# Altium PCB ETS_v8-nordic-split_1-sided.PcbDoc
Units mil, origin at the board's own origin, x right, y up, seen from the top; angles counter-clockwise.
Board outline 1165.35 x 326.77 mil, 2 copper layers (Top Layer, Bottom Layer), stack 62.8 mil thick; 35 components, 30 nets, 135 pads, 36 vias.
Unrouted connection lines stored in the file: 6.
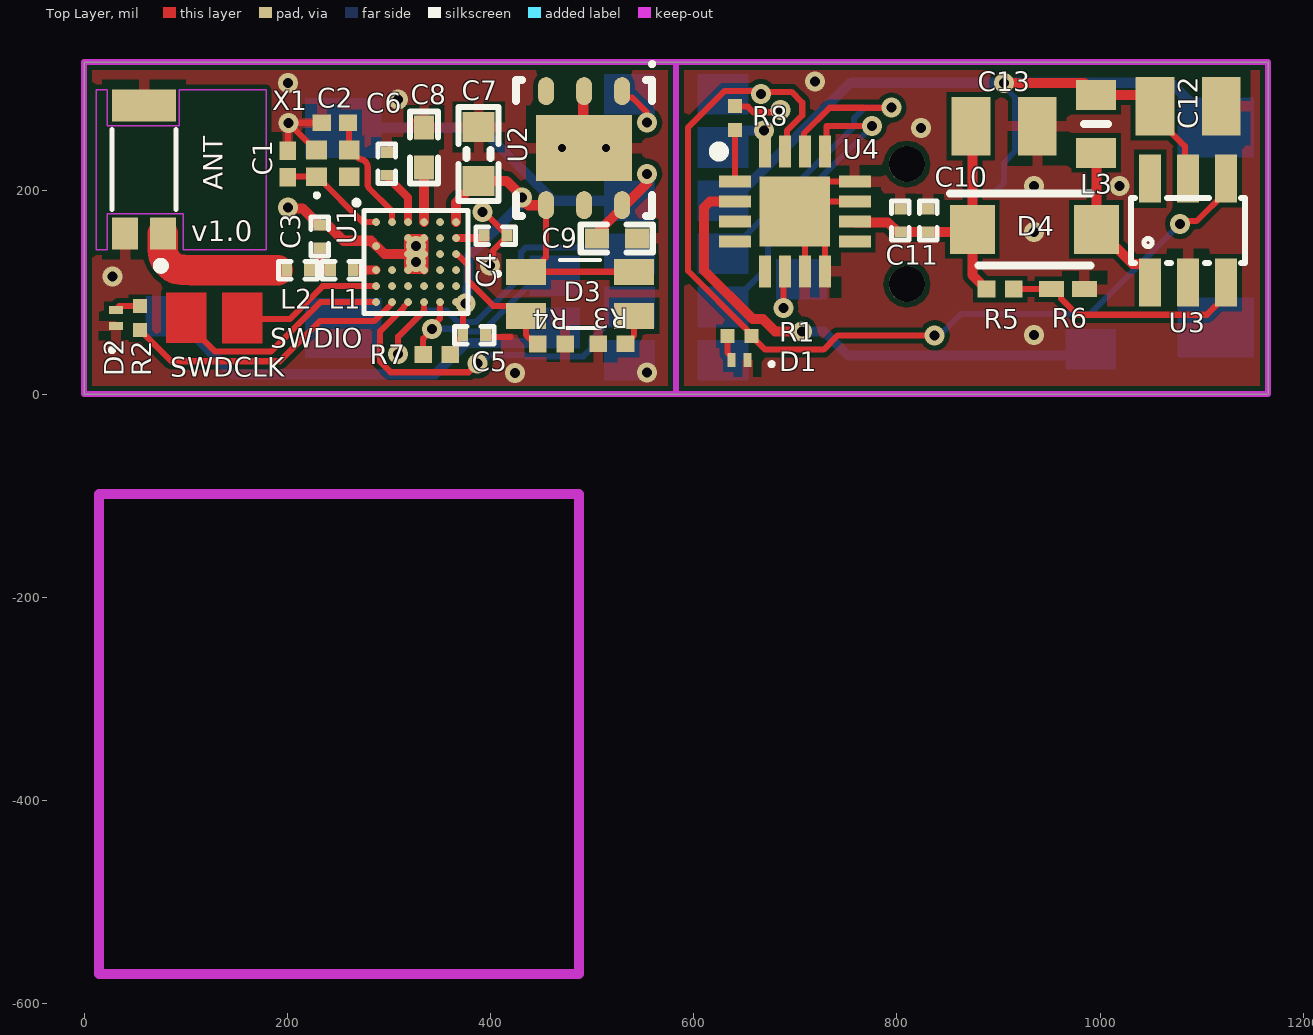
[diagram p0: Top Layer view]
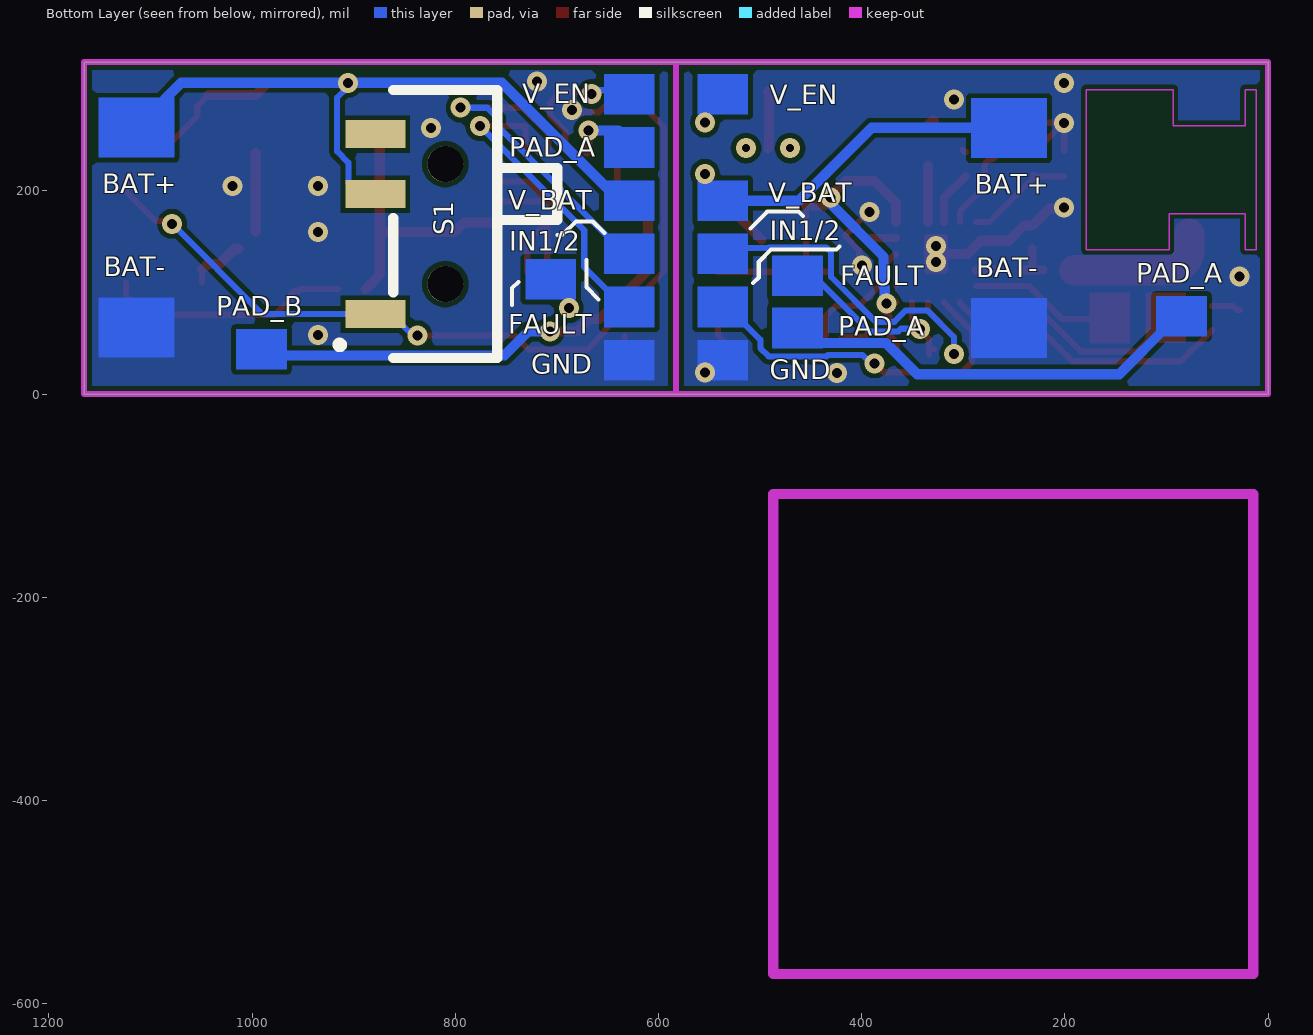
[diagram p1: Bottom Layer view, seen from below]
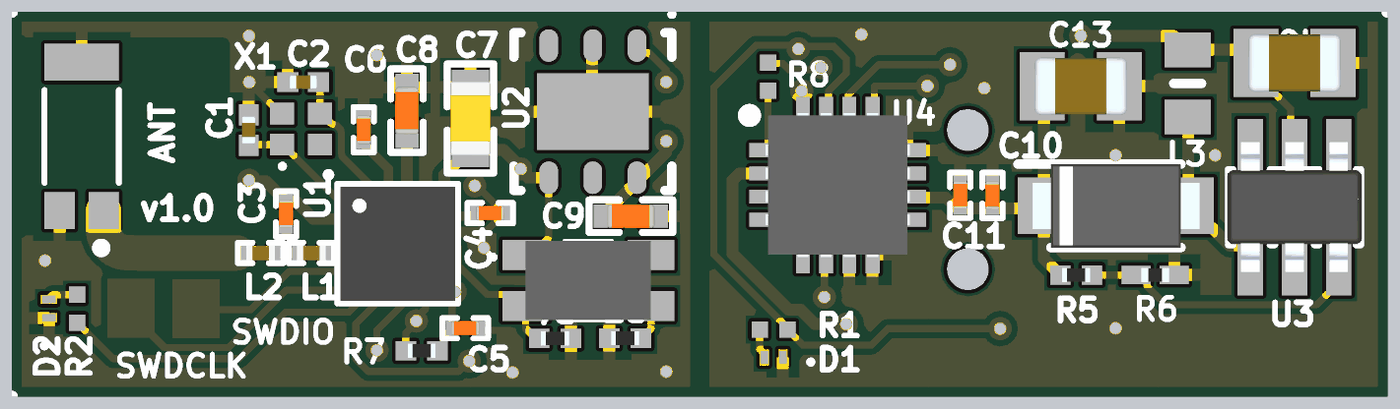
[diagram p2: 3D render of the assembled board from above, using the file's embedded part models]

## Layer stack, top to bottom
Top Solder: solder mask 0.4, Solder Resist, Dk 3.5
Top Layer: signal copper 1.4
Dielectric1: core 60, FR-4, Dk 4.8
Bottom Layer: signal copper 1.4
Bottom Solder: solder mask 0.4, Solder Resist, Dk 3.5

## Board outline
0,0 1165.35,0 1165.35,326.77 0,326.77

## Design rules (kind name [scope] priority, off if disabled: settings)
Clearance Polygon_ANT [(InNamedPolygon('Top_Layer-GND')) or (InNamedPolygon('Bottom_Layer-GND')) vs InNet('RF')] p1: gap=5 ignorepadtopadclearanceinfootprint=FALSE except(0: Arc-Hole Track-Hole SMDPad-Hole THPad-Hole Via-Hole Fill-Hole Poly-Hole Region-Hole Text-Hole)
Clearance Polygon [(InNamedPolygon('Top_Layer-GND')) or (InNamedPolygon('Bottom_Layer-GND')) or (InNamedPolygon('Mid_Layer_1-GND')) or (InNamedPolygon('Mid_Layer_2-GND'))] p2: gap=8 ignorepadtopadclearanceinfootprint=FALSE except(0: Arc-Hole Track-Hole SMDPad-Hole THPad-Hole Via-Hole Fill-Hole Poly-Hole Region-Hole Text-Hole)
Clearance [All] p3: gap=5 ignorepadtopadclearanceinfootprint=FALSE except(3.5: Arc-Arc Arc-Track Track-Track)
ComponentClearance [All] p1 off: gap=10 collisioncheckmode=3 verticalgap=10 showdistances=FALSE
FabricationTestPointUsage TestPointUsage [All] p1: valid=0 allowmultiple=FALSE
FabricationTestpoint Testpoint [All] p1: side=3 testpointundercomponent=TRUE minsize=40 maxsize=100 preferedsize=60 minholesize=0 maxholesize=40 preferedholesize=32 testpointgrid=1 allowsidetop=TRUE allowsidebottom=TRUE usegrid=TRUE gridtolerance=0.01
Height [All] p1 off: minheight=0 maxheight=1000 prefheight=500
HoleSize [All] p1: absolutevalues=TRUE maxlimit=248.03 minlimit=7.87 maxpercent=80.000 minpercent=20.000
HoleToHoleClearance [All] p1 off: gap=3 allowstackedmicrovias=FALSE
MinimumAnnularRing [All] p1 off: minimumring=3
PolygonConnect PolygonConnect_1 [isVia and innet(gnd)] p1: connectstyle=Direct reliefconductorwidth=10 reliefentries=4 polygonreliefangle="90 Angle" airgapwidth=10
PolygonConnect [All] p2: connectstyle=Relief reliefconductorwidth=10 reliefentries=4 polygonreliefangle="90 Angle" airgapwidth=10
RoomDefinition ETS_v8-nordic-split [InComponentClass('ETS_v8-nordic-split')] p1: confinementstyle=ConfineIn formatcopy=TRUE lockcomponents=FALSE outline -86.61,-122.05 1255.91,-122.05 1255.91,386.77 -86.61,386.77
RoutingVias [All] p1: holewidth=16 width=32 viastyle="Through Hole" minholewidth=3.94 minwidth=9.84 maxholewidth=28 maxwidth=50
SilkToSolderMaskClearance SilkscreenOverComponentPads [IsPad] p1: minsilkscreentomaskgap=10 clearancetoexposedcopper=TRUE
SolderMaskExpansion [All] p1: expansion=3 istentingtop=FALSE
Width [All] p1: maxlimit=100 minlimit=5 preferedwidth=6 minimp=50.000000 maximp=50.000000 favimp=50.000000
23 further rules are at their usual default settings.

## Components (designator, comment, footprint, x,y, rotation, side; value= is the part's Value field where it differs from the comment)
ANT "W3008" *ANTENNA_W3008W3008(Primary) 59.06,220.98 r270 top
C1 "16pF" CAPC0603X33N 200.49,226.38 r270 top
C2 "16pF" CAPC0603X33N 246.75,267.1 r0 top
C3 "1.2pF" CAPC0603X03L_C 232.15,155.04 r270 top
C4 "100nF" CAPC0603X03L_C 405.16,155.84 r0 top
C5 "100nF" CAPC0603X03L_C 383.98,58.08 r0 top
C6 "100pF" CAPC0603X03L_C 297.96,226.69 r270 top
C7 "4.7µF" CAPC1608X06L 388.37,236.22 r90 top
C8 "1.0µF" CAPC1005X04L 334.65,242.87 r270 top
C9 "1.0µF" CAPC1005X04L 524.31,153.29 r180 top
C10 "100nF" CAPC0603X03L_C 830.71,170.86 r90 top
C11 "100nF" CAPC0603X03L_C 803.36,170.96 r270 top
C12 "22uF" CAPC2012X145N 1086.61,283.35 r0 top
C13 "22uF" CAPC2012X145N 905.51,263.62 r0 top
D1 "APG0603VGC-TT-5MAV" LED_APG0603SEC-E-TT 645.24,33.35 r180 top
D2 "APG0603SURC-TT" LED_APG0603SEC-E-TT 31.33,74.77 r90 top
D3 "GP2S60A" GP2S60B 488.19,98.73 r0 top
D4 "SS34FA" SODFL3618X143N 935.32,162.06 r0 top
L1 "2.2nH" INDC0603X03L_C 253.65,122.05 r180 top
L2 "3.3nH" INDC0603X03L_C 210.65,122.04 r180 top
L3 "LQM18PH4R7MFRL" LQW18CA32NJ00D 996.06,265.98 r270 top
R1 "60R 1% 0201(0603)" RESC0201(0603)_L 645.24,56.97 r180 top value="1.00 Ohm"
R2 "137R 1% 0201(0603)" RESC0201(0603)_L 55.12,74.8 r90 top value="1.00 Ohm"
R3 "210R 1% 0201(0603)" RESC0603X26N 519.46,49.58 r0 top
R4 "324R 1% 0201(0603)" RESC0603X26N 460.06,49.42 r180 top
R5 "10kR" RESC0603X26N 901.57,103.31 r180 top
R6 "4.7kR" RESC0603X28N 968.5,103.31 r180 top
R7 "1kR" RESC0603X26N 347.12,38.96 r0 top
R8 "120mR 1% 0201(0603)" RESC0201(0603)_L 640.56,271.65 r90 top value="1.00 Ohm"
S1 "SSSS810701" SSSS810701 878.75,196.83 r90 bottom
U1 "nRF52811-CAAA" BGA33C40P6X6_247X246X50 326.77,129.92 r0 top
U2 "LD39050PU33R" DFN6D_L 492.13,242.03 r270 top
U3 "" *SOT23-6 1086.61,160.92 r0 top
U4 "DRV8847RTER" QFN50P300X300X80-17N-D 699.62,179.71 r0 top
X1 "ECS-320-10-48-CKY-TR" ECS240848CKYTR 244.78,227.15 r0 top

## Footprints (in the part's own frame and the unit in brackets; to place one, negate y for a bottom-side part, rotate by r counter-clockwise, add the part's x,y. Pads: shape width x height; smd on the part's side, far side on the other; paste and mask are expansions set on the pad)
*ANTENNA_W3008W3008(Primary) [mm]
  rect 0.8x0.65 smd: FEED(1.6,0.475) G1(1.6,-0.475)
  rect 0.8x1.6 smd: G2(-1.6,0)
  Keep-Out Layer region: -2,-1.2 -2,-0.925 -1.1,-0.925 -1.1,0.875 -2,0.875 -2,3.05 2,3.05 2,0.975 1.1,0.975 1.1,-0.925 2,-0.925 2,-1.2
  Keep-Out Layer region: -2,-1.2 2,-1.2 2,-0.925 1.1,-0.925 1.1,0.975 2,0.975 2,3.05 -2,3.05 -2,0.875 -1.1,0.875 -1.1,-0.925 -2,-0.925
  Keep-Out Layer region: -2,-1.2 -2,-0.925 -1.1,-0.925 -1.1,0.875 -2,0.875 -2,3.05 2,3.05 2,0.975 1.1,0.975 1.1,-0.925 2,-0.925 2,-1.2
  Keep-Out Layer region: -2,-1.2 2,-1.2 2,-0.925 1.1,-0.925 1.1,0.975 2,0.975 2,3.05 -2,3.05 -2,0.875 -1.1,0.875 -1.1,-0.925 -2,-0.925
  Keep-Out Layer region: -2,-1.2 -2,-0.925 -1.1,-0.925 -1.1,0.875 -2,0.875 -2,3.05 2,3.05 2,0.975 1.1,0.975 1.1,-0.925 2,-0.925 2,-1.2
  Keep-Out Layer region: -2,-1.2 2,-1.2 2,-0.925 1.1,-0.925 1.1,0.975 2,0.975 2,3.05 -2,3.05 -2,0.875 -1.1,0.875 -1.1,-0.925 -2,-0.925
  silkscreen extent -1,-0.8 2.5,0.8
*SOT23-6 [mm]
  rect 0.55x1.2 smd: 1(-0.95,-1.3) 2(0,-1.3) 3(0.95,-1.3) 4(0.95,1.3) 5(0,1.3) 6(-0.95,1.3)
  silkscreen extent -1.42,-0.81 1.42,0.81, body extent -1.45,-1.4 1.45,1.4, height 1.45
BGA33C40P6X6_247X246X50 [mm] "BGA, 33-Leads, Body 2.47x2.46mmx0.50mm, Pitch 0.40mm"
  round 0.194 smd mask+0.05: A1(-1,1) A2(-0.6,1) A3(-0.2,1) A4(0.2,1) A5(0.6,1) A6(1,1) B3(-0.2,0.6) B4(0.2,0.6) B5(0.6,0.6) B6(1,0.6) C1(-1,0.4) D3(-0.2,0.2) D4(0.2,0.2) D5(0.6,0.2) D6(1,0.2) E1(-1,-0.2) E2(-0.6,-0.2) E3(-0.2,-0.2) E4(0.2,-0.2) E5(0.6,-0.2) E6(1,-0.2) F1(-1,-0.6) F2(-0.6,-0.6) F3(-0.2,-0.6) F4(0.2,-0.6) F5(0.6,-0.6) F6(1,-0.6) G1(-1,-1) G2(-0.6,-1) G3(-0.2,-1) G4(0.2,-1) G5(0.6,-1) G6(1,-1)
  silkscreen extent -1.55,-1.29 1.3,1.55, body extent -1.23,-1.23 1.23,1.23, height 0.5
CAPC0603X03L_C [mm] "Chip Capacitor, 2-Leads, Body 0.6x0.3mm, IPC High Density"
  rect 0.27x0.3 smd: 1(-0.285,0) 2(0.285,0)
  silkscreen extent -0.49,-0.22 0.49,0.22, body extent -0.3,-0.15 0.31,0.15, height 0.3
CAPC0603X33N [mm]
  rect 0.46x0.42 smd: 1(-0.33,0) 2(0.33,0)
  body extent -0.3,-0.15 0.3,0.15, height 0.33
CAPC1005X04L [mm] "Chip Capacitor, 2-Leads, Body 1.0x0.5mm, IPC High Density"
  rect 0.6x0.5 smd: 1(-0.5,0) 2(0.5,0)
  silkscreen extent -0.9,-0.35 0.9,0.35, body extent -0.51,-0.25 0.51,0.25, height 0.5
CAPC1608X06L [mm] "Chip Capacitor, 2-Leads, Body 1.6x0.8mm, IPC High Density"
  rect 0.75x0.8 smd: 1(-0.675,0) 2(0.675,0)
  silkscreen extent -1.17,-0.5 1.17,0.5, body extent -0.8,-0.43 0.8,0.43, height 0.8
CAPC2012X145N [mm]
  rect 0.97x1.47 smd: 1(-0.83,0) 2(0.83,0)
  body extent -1,-0.63 1,0.63, height 1.45
DFN6D_L [mm] "SON, 6-Leads, Body 3x3mm, Pitch 0.95mm, Thermal Pad 2.4x1.65mm, IPC High Density"
  oval 0.7x0.4 smd: 1(-1.425,0.95) 2(-1.425,0) 3(-1.425,-0.95) 4(1.425,-0.95) 5(1.425,0) 6(1.425,0.95)
  rect 1.65x2.4 smd: 7(0,0)
  silkscreen extent -2.15,-1.7 1.7,1.75, body extent -1.55,-1.55 1.55,1.55, height 0.95
ECS240848CKYTR [mm]
  rect 0.52x0.47 smd: 1(-0.41,-0.335) 2(0.41,-0.335) 3(0.41,0.335) 4(-0.41,0.335)
  silkscreen extent -0.45,-0.85 -0.35,-0.75
GP2S60B [mm]
  rect 1x0.65 smd: 1(-1.35,0.55) 2(-1.35,-0.55) 3(1.35,-0.55) 4(1.35,0.55)
  silkscreen extent -2.1,-0.85 0.5,0.85, body extent -1.35,-0.85 1.35,0.85, height 1.35
INDC0603X03L_C [mm] "Chip Inductor, 2-Leads, Body 0.6x0.3mm, IPC High Density"
  rect 0.27x0.3 smd: 1(-0.285,0) 2(0.285,0)
  silkscreen extent -0.49,-0.22 0.49,0.22, body extent -0.31,-0.16 0.31,0.16, height 0.26
LED_APG0603SEC-E-TT [mm]
  rect 0.2x0.35 smd paste-1: A(0.2,0) C(-0.2,0)
  silkscreen extent -0.85,0.05 -0.75,0.15
LQW18CA32NJ00D [mm]
  rect 0.75x1 smd: 1(-0.725,0) 2(0.725,0)
  silkscreen extent 0,-0.3 0,0.3
QFN50P300X300X80-17N-D [mm]
  rect 0.8x0.3 smd: 1(-1.5,0.75) 2(-1.5,0.25) 3(-1.5,-0.25) 4(-1.5,-0.75) 9(1.5,-0.75) 10(1.5,-0.25) 11(1.5,0.25) 12(1.5,0.75)
  rect 0.3x0.8 smd: 5(-0.75,-1.5) 6(-0.25,-1.5) 7(0.25,-1.5) 8(0.75,-1.5) 13(0.75,1.5) 14(0.25,1.5) 15(-0.25,1.5) 16(-0.75,1.5)
  rect 1.76x1.76 smd: 17(0,0)
  silkscreen extent -2.02,1.38 -1.77,1.62, body extent -1.55,-1.55 1.55,1.55, height 0.8
RESC0201(0603)_L [mm] "Chip Resistor, Body 0.6x0.3mm, IPC High Density"
  rect 0.35x0.35 smd: 1(-0.3,0) 2(0.3,0)
  body extent -0.31,-0.16 0.31,0.16, height 0.3
RESC0603X26N [mm]
  rect 0.44x0.42 smd: 1(-0.34,0) 2(0.34,0)
  body extent -0.3,-0.15 0.3,0.15, height 0.26
RESC0603X28N [mm]
  rect 0.625x0.4 smd: 1(-0.412,0) 2(0.412,0)
  body extent -0.3,-0.15 0.3,0.15, height 0.28
SODFL3618X143N [mm]
  rect 1.12x1.22 smd: 1(-1.55,0) 2(1.55,0)
  silkscreen extent -2.11,-0.9 1.4,0.9, body extent -1.8,-0.9 1.8,0.9, height 1.43
SSSS810701 [mm]
  rect 0.7x1.5 smd: 1(-3,0) 2(0,0) 3(1.5,0)
  round 0.9 hole 0.9 unplated: 4(-2.25,-1.75) 5(0.75,-1.75)
  silkscreen extent -4.1,-4.55 2.6,0.94

## Part data
ANT: "2.4GHz Bluetooth Chip RF Antenna 2.4GHz ~ 2.483GHz 1.7dBi Solder Surface Mount", Package=None, Availability=Unavailable, MF="PulseLarsen Antennas", MP=W3008, Price=None, SnapEDA_Link=https://www.snapeda.com/parts/W3008/PulseLarsen%20Antennas/view-part/233875/?ref=snap
C1 C2: library part GRM0335C1H160JA01D, "Capacitor", Manufacturer_Name="Murata Electronics", Datasheet Link=http://www.murata.com/~/media/webrenewal/support/library/catalog/products/capacitor/mlcc/c02e.pdf, Height=0.33mm, Manufacturer_Part_Number=GRM0335C1H160JA01D
C3: library part C0201-1.2p, "Capacitor, NP0, ±5%", Footprint Doc=0201, LatestRevisionDate=2014-11-13, Part Number=C0201-1.2p, Pin Count=2, Published=2014-11-13, Publisher="Nordic Semiconductor"
C4 C5: library part C0201-100n, "Capacitor, X5R, ±10%", Footprint Doc=0201, LatestRevisionDate=2017-11-09, Part Number=C0201-100n, Pin Count=2, Published=2014-11-13, Publisher="Nordic Semiconductor"
C6: library part C0201-100p, "Capacitor, NP0, ±2%", Footprint Doc=0201, LatestRevisionDate=2017-11-09, Part Number=C0201-100p, Pin Count=2, Published=2014-11-13, Publisher="Nordic Semiconductor"
C7: library part C0603-4µ7, "Capacitor, X5R, ±10%", Footprint Doc=0603, LatestRevisionDate=2009-11-23, Part Number=C0603-4µ7, Pin Count=2, Published=2009-05-08, Publisher="Nordic Semiconductor"
C8 C9: library part C0402-1µ0, "Capacitor, X5R, ±5%", Footprint Doc=0402, LatestRevisionDate=2016-08-22, Part Number=C0402-1µ0, Pin Count=2, Published=2009-05-08, Publisher="Nordic Semiconductor"
C10: "Capacitor, X5R, ±10%", Part Number=C0201-100n, Footprint Doc=0201, LatestRevisionDate=2017-11-09, Pin Count=2, Published=2014-11-13, Publisher="Nordic Semiconductor"
C11: library part GRM188R61C106KAALD, "Capacitor", Manufacturer_Name="Murata Electronics", Datasheet Link=https://psearch.en.murata.com/capacitor/product/GRM188R61C106KAAL%23.html, Height=0.9mm, Manufacturer_Part_Number=GRM188R61C106KAALD
C12 C13: library part GRM21BR61E226ME44K, "Capacitor", Manufacturer_Name="Murata Electronics", Datasheet Link=http://www.murata.com/~/media/webrenewal/support/library/catalog/products/capacitor/mlcc/c02e.pdf, Height=1.45mm, Manufacturer_Part_Number=GRM21BR61E226ME44K
D1: library part APG0603SEC-E-TT, "Green 527nm LED Indication - Discrete 3V 2-SMD, 0201", Package="0201 Kingbright", Availability=Unavailable, MF=Kingbright, MP=APG0603SEC-E-TT, Price=None, SnapEDA_Link=https://www.snapeda.com/parts/APG0603SEC-E-TT/Kingbright/view-part/2754377/?ref=snap
D2: library part APG0603SEC-E-TT, "Red 631nm LED Indication - Discrete 1.92V 2-SMD, 0201", Package="0201 Kingbright", Availability=Unavailable, MF=Kingbright, MP=APG0603SEC-E-TT, Price=None, SnapEDA_Link=https://www.snapeda.com/parts/APG0603SEC-E-TT/Kingbright/view-part/2754377/?ref=snap
D3: library part GP2S60B, "LED", Manufacturer_Name="Sharp Microelectronics", Mouser2 Part Number=852-GP2S60B, Datasheet Link=https://componentsearchengine.com/Datasheets/1/GP2S60B.pdf, Height=1.25mm, Manufacturer_Part_Number=GP2S60B, Mouser2 Price/Stock=https://www.mouser.com/Search/Refine.aspx?Keyword=852-GP2S60B
D4: "Schottky Diode", Manufacturer_Name="ON Semiconductor", Mouser2 Part Number=512-SS34FA, Datasheet Link=https://componentsearchengine.com/Datasheets/1/SS34FA.pdf, Height=1.43mm, Manufacturer_Part_Number=SS34FA, Mouser2 Price/Stock=https://www.mouser.com/Search/Refine.aspx?Keyword=512-SS34FA
L1: library part L0201-2n2, "High frequency chip inductor ±5%", Footprint Doc=0201, LatestRevisionDate=2013-04-10, Part Number=L0201-2n2, Pin Count=2, Published=2013-04-10, Publisher="Nordic Semiconductor"
L2: library part L0201-3n3, "High frequency chip inductor ±5%", Footprint Doc=0201, LatestRevisionDate=2013-04-10, Part Number=L0201-3n3, Pin Count=2, Published=2013-04-10, Publisher="Nordic Semiconductor"
L3: "Inductor", Manufacturer_Name="Murata Electronics", Mouser2 Part Number=81-LQM18PH4R7MFRL, Datasheet Link=https://psearch.en.murata.com/inductor/product/LQM18PH4R7MFR%23.html, Height=0.95mm, Manufacturer_Part_Number=LQM18PH4R7MFRL, Mouser2 Price/Stock=https://www.mouser.com/Search/Refine.aspx?Keyword=81-LQM18PH4R7MFRL
R1 R2 R8: library part CMP-1010-00171-1, "1R 0.05W 1% 0201 (0603 Metric)  SMD", Case-EIA=0201, Case-Metric=0603, Power="0.05 W", Tolerance="1 %", Technology=SMT
R3: library part RC0201FR-0710KL, "Resistor", Manufacturer_Name="YAGEO (PHYCOMP)", Mouser2 Part Number=603-RC0201FR-0710KL, Datasheet Link=https://componentsearchengine.com/Datasheets/1/RC0201FR-0710KL.pdf, Height=0.26mm, Manufacturer_Part_Number=RC0201FR-0710KL, Mouser2 Price/Stock=https://www.mouser.com/Search/Refine.aspx?Keyword=603-RC0201FR-0710KL
R4: library part RC0201FR-07390RL, "Resistor", Manufacturer_Name="YAGEO (PHYCOMP)", Datasheet Link=http://www.yageo.com/documents/recent/PYu-RC0201_51_RoHS_L_8.pdf, Height=0.26mm, Manufacturer_Part_Number=RC0201FR-07390RL
R5: library part RC0201FR-07100KL, "Resistor", Manufacturer_Name="YAGEO (PHYCOMP)", Datasheet Link=http://www.yageo.com/documents/recent/PYu-RC0201_51_RoHS_L_8.pdf, Height=0.26mm, Manufacturer_Part_Number=RC0201FR-07100KL
R6: library part CRCW02014K70FKED, "Resistor", Manufacturer_Name=Vishay, Datasheet Link=http://www.vishay.com/docs/20035/dcrcwe3.pdf, Height=0.28mm, Manufacturer_Part_Number=CRCW02014K70FKED
R7: library part CRCW02011K00FNED, "Resistor", Manufacturer_Name=Vishay, Datasheet Link=http://www.vishay.com/docs/20035/dcrcwe3.pdf, Height=0.28mm, Manufacturer_Part_Number=CRCW02011K00FNED
S1: "Switch", Manufacturer_Name=ALPS, Mouser2 Part Number=688-SSSS810701, Datasheet Link=https://componentsearchengine.com/Datasheets/1/SSSS810701.pdf, Manufacturer_Part_Number=SSSS810701, Mouser2 Price/Stock=https://www.mouser.com/Search/Refine.aspx?Keyword=688-SSSS810701
U1: library part nRF52811-CAAAA0, "Multi-protocol Bluetooth Low Energy, IEEE 802.15.4, ANT and 2.4GHz proprietary system-on-chip", Manufacturer="Nordic Semiconductor", Footprint Doc=WLCSP-33, LatestRevisionDate=2019-01-30, Manufacturer Part Number=nRF52811-CAAAA0, Part Number=nRF52811-CAAAA0, Pin Count=33, Published=2019-01-30, Publisher="Nordic Semiconductor"
U2: library part CMP-0244-00288-1, "500 mA Low Quiescent Current Low Noise Voltage Regulator, 3.3V, 6-Pin VDFDPN, Tape and Reel", ComponentLink1Description="Manufacturer URL", ComponentLink1URL=http://www.st.com, ComponentLink2Description=Datasheet, ComponentLink2URL=http://www.st.com/internet/com/TECHNICAL_RESOURCES/TECHNICAL_LITERATURE/DATASHEET/CD00227527.pdf, DatasheetVersion=1/03/2009, PackageDescription="6-Pin Plastic, Dual LLP, 3 x 3 mm Body, 0.95 mm Pitch, Exposed Pad", PackageReference=DFN6D, PackageVersion=2008
U3: library part MT3608, "High Efficiency 1.2MHz / 2A Step Up Converter", SnapEDA_Link=https://www.snapeda.com/parts/MT3608/Aerosemi%20Technology%20Co.%2C%20Ltd/view-part/3218014/?ref=snap
U4: "Integrated Circuit", Manufacturer_Name="Texas Instruments", Mouser2 Part Number=595-DRV8847RTER, Datasheet Link=http://www.ti.com/lit/gpn/DRV8847, Height=0.8mm, Manufacturer_Part_Number=DRV8847RTER, Mouser2 Price/Stock=https://www.mouser.com/Search/Refine.aspx?Keyword=595-DRV8847RTER
X1: "Crystal or Oscillator", Manufacturer_Name=ECS, Datasheet Link=https://www.ecsxtal.com/store/pdf/ECX-1048.pdf, Height=0mm, Manufacturer_Part_Number=ECS-320-10-48-CKY-TR

## Free pads (board coordinates)
  round 19.68 on Mech16: 1(326.77,145.67) 2(326.77,129.92)

## Via types
v1: diameter 19.68, hole 9.84, Top Layer to Bottom Layer, tented both sides, 34 vias
v2: diameter 19.68, hole 7.87, Top Layer to Bottom Layer, 2 vias

## Nets (pads, with @x,y where several pads share a name; then routed paths per layer and width w, separated by ;. In a path a pad name is that pad's centre, name@x,y a point inside that pad or via, vN(x,y) a via of type N, cw(c..) or ccw(c..) an arc to the next point about the centre after c; other vN are vias at no path point)
DEC1: C4.1 U1.B6 | length 29.3
  Top Layer w8: U1.B6 C4.1@395.43,153.54
DEC2: C6.2 U1.A3 | length 53.7
  Top Layer w8: C6.2@297.96,214.29 318.9,193.35 U1.A3
DEC4: C8.2 U1.A4 | length 55.4
  Top Layer w10: U1.A4 C8.2@334.65,224.73
GND: ANT.G1 ANT.G2 C1.1 C2.1 C3.1 C4.2 C5.2 C6.1 C7.2 C8.1 C9.1 C10.2 C11.1 C12.2 C13.2 D1.C D2.C R3.1 R4.1 R6.1 R8.2 U1.B3 U1.B4 U1.C1 U1.D3 U1.D4 U1.E3 U1.E4 U2.2 U2.7 U3.2 U4.7 U4.8 U4.11 U4.12 U4.17 X1.4 | length 808.4
  Top Layer w6: C1.1 200.59,239.47 v1@200.59,267 ; X1.4 227.66,240.34 v1(201,267) v1@200.59,267 ; C3.1@231.56,166.26 C3.1 ; C2.1 200.69,267.1 v1@200.59,267 ; U1.C1 U1.C1@287.84,145.67 ; C6.1@297.55,238.32 C6.1 298.55,237.91 300.87,240.22 C6.1@300.87,240.81 ; v1@309.15,289.04 v1(309.15,290.01) ; v1(392.07,179.02) 393.78,179.02 416.38,156.43 C4.2 416.38,155.25 402.38,141.25 402.38,128.98 v1(399.76,126.36) ; C5.2 397.01,56.28 419.81,56.28 ; R8.2 641.01,283.01 653.2,283.01 658.78,277.43 683.23,277.43 v1(685.33,279.53) ; U4.7 U4.17@709.46,169.87 ; U4.8 729.14,150.18 U4.17@709.46,169.87 ; U4.11 U4.17@709.46,189.55 ; U4.12 729.14,209.24 U4.17@709.46,189.55 ; U4.17@709.46,169.87 U4.17 U4.17@709.46,189.55
  Top Layer w8: U1.B3 U1.B4 ; U1.B3@319.02,153.29 U1.D3@319.02,137.8 ; U1.E4 U1.E3 U1.D3 U1.D3@319.02,137.8 ; U1.D4 U1.D3@319.02,137.8 ; U1.E4@334.77,121.8 334.77,137.54 U1.B4@334.77,153.29
  Top Layer w10: v1(200.75,183.7) 201.63,182.82 215,182.82 C3.1@231.56,166.26 ; C3.1 232.46,165.95 240.31,165.95 255.4,150.86 282.21,150.86 U1.C1 ; U1.C1@287.84,145.67 295.72,137.8 U1.D3 ; C8.1@328.83,269.36 329.8,269.36 334.65,264.52 C8.1 ; U2.7 491.34,242.81 491.34,297.35 U2.2
  Bottom Layer w6: 515.85,16.35 518.38,18.88
  other v1: 424.1,20.52 554.24,21.27 934.98,58.08 27.97,115.55 326.77,129.92 326.77,145.67 934.98,159.64 934.98,204.96 1019.31,204.96 823.71,261.92 200.75,306.4 719.59,307.57
HV: C10.1 C11.2 C13.1 D4.1 R5.2 U4.10 | length 284.5
  Top Layer w6: C11.2 C11.2@803.41,159.69 ; C10.1@830.66,159.69 C10.1 ; C13.1 C13.1@874.3,262.16
  Top Layer w10: U4.10 759.58,168.96 774.16,168.96 774.2,168.93 791.27,168.93 C11.2@800.35,159.85 ; C11.2@803.41,159.69 C10.1@830.66,159.69 ; C10.1 871.88,159.64 D4.1 ; C13.1@874.3,262.16 D4.1 ; R5.2 874.3,117.2 D4.1
NetC3_2: C3.2 L1.2 L2.1 | length 42.8
  Top Layer w8: 231.65,122.04 232.15,122.54 C3.2
  Top Layer w9: L2.1@221.4,122.04 L2.1 231.65,122.04 L1.2@242.17,122.04
NetD1_A: D1.A R1.2 | length 25.3
  Top Layer w6: R1.2 633.43,40.24 637.37,36.3 D1.A
NetD2_A: D2.A R2.2 | length 29.2
  Top Layer w6: D2.A@27.56,82.68 30.51,82.68 34.45,86.61 R2.2
NetD3_3: D3.3 R3.2 | length 26.9
  Top Layer w6: R3.2@533.07,49.41 541.34,57.67 D3.3@541.34,72.83
NetD4_2: D4.2 L3.2 U3.1 | length 145.7
  Top Layer w6: L3.2 L3.2@996.34,237.16 ; U3.1@1041.39,130.36 1049.21,122.53 1049.21,122.33 U3.1
  Top Layer w10: D4.2@996.34,160.09 D4.2 L3.2@996.34,237.16 ; D4.2@1013.39,143.04 1017.09,143.04 1031.97,128.16 1043.39,128.16 U3.1@1049.21,122.33
NetL1_1: L1.1 U1.E1 | length 22.5
  Top Layer w9: L1.1 U1.E1
NetR5_1: R5.1 R6.2 U3.3 | length 240.4
  Top Layer w6: R5.1 R6.2 ; R6.2@953.89,101.69 958.33,101.69 961.59,98.44 961.59,94 977.47,78.11 1105.19,78.11 1124.02,96.94 U3.3
NetR8_1: R8.1 U4.1 | length 50.6
  Top Layer w6: U4.1 R8.1
P0.03/AIN1: D3.2 R4.2 U1.D6 | length 132
  Top Layer w6: U1.D6 366.59,137.8 367.4,136.98 367.93,136.98 377.96,126.94 377.96,111.61 402.7,86.87 425.24,86.87 D3.2 ; D3.2@435.04,75.87 435.04,58.08 R4.2@442.93,50.2
P0.05/AIN3: U1.E6
P0.08: U1.F6 | length 0
P0.12: R7.1 U1.G5 U4.6 | length 271.1
  Top Layer w6: R7.1@328.87,44.28 R7.1@329.27,44.28 ; R7.1 333.73,54.45 342.52,63.24 v1(342.52,64.29) ; v1@345.68,66.48 345.68,69.93 350.39,74.65 U1.G5 ; v1(688.25,84.51) 688.25,119.14 U4.6
  Bottom Layer w6: v1(342.52,64.29) 361.38,64.29 364.04,61.63 392.36,61.63 444.11,113.38 462.45,113.38 ; v1(688.25,84.51) 688.25,97.7 704.72,114.17
P0.15: U1.G4 U4.14 | length 704.6
  Top Layer w6: v1(309.15,39.37) 309.15,56.59 334.65,82.08 U1.G4 ; U4.14 708.54,239.69 708.54,256.48 733.91,281.86 v1(794.7,281.86)
  Bottom Layer w6: v1(309.15,39.37) 309.15,56.15 335.13,82.13 356.97,82.13 367.97,71.13 385.98,71.13 430.19,115.34 430.19,139.62 434.88,144.31 491.5,144.31 492.19,143.62 519.69,143.62 527.56,135.75 ; 629.74,137.8 632.61,137.8 757.75,262.93 757.75,271.17 768.44,281.86 v1(794.7,281.86)
P0.16: U1.G3 U4.13 | length 663.5
  Top Layer w6: U1.G3 318.9,90.15 314.97,86.22 314.97,85.66 291.31,62 291.31,31.98 301.76,21.53 378.63,21.53 v1(387.39,30.29) ; U4.13 730.72,240.35 730.72,263.78 v1(775.59,263.78)
  Bottom Layer w6: v1(387.39,30.29) 390.95,30.29 399.29,38.63 433.33,38.63 434.88,37.08 491.5,37.08 499.62,45.2 499.62,53.48 532.75,86.61 535.43,86.61 ; 629.92,83.98 632.13,83.98 673.1,124.95 673.1,161.29 v1(775.59,263.78)
P0.20: R2.1 U1.G2 | length 285.6
  Top Layer w6: R2.1 85.79,32.32 192.56,32.32 232.14,71.9 285.46,71.9 U1.G2@303.63,90.07 ; U1.G2@303.15,90.11 U1.G2
PAD_A: U4.16 | length 469.4
  Top Layer w10: v1(669.03,259.59) 669.85,259.59 669.85,239.01 U4.16
  Bottom Layer w10: 97.44,68.46 146.37,19.53 345.37,19.53 375.97,50.13 446.15,50.13 458.43,62.41 ; 625.98,245.98 639.6,259.59 v1(669.03,259.59)
PAD_B: U4.2 | length 510.1
  Top Layer w10: U4.2 616.09,189.55 610.24,183.7 610.24,121.67 658.05,73.86 668.09,73.86 680.32,61.63 v1(706.82,61.63)
  Bottom Layer w6: 984.83,41.21 988.19,44.57
  Bottom Layer w10: v1(706.82,61.63) 728.21,61.63 751.88,37.97 981.59,37.97 984.83,41.21
RF: ANT.FEED L2.2 | length 140.1
  Top Layer w30: ANT.FEED@77.44,157.67 77.44,142.24 ccw(c97.44,142.24) 97.01,122.24 106.17,122.04 190.65,122.04
SWDCLK: U1.G1 | length 221.8
  Top Layer w6: 98.43,72.44 129.04,41.82 183.86,41.82 232.59,90.55 U1.G1
SWDIO: U1.F1 | length 143.4
  Top Layer w6: 157.48,73.79 202.39,73.79 234.9,106.3 U1.F1
VDD_NRF: C5.1 C7.1 D3.1 D3.4 R7.2 U1.A6 U1.G6 U2.4 | length 491.9
  Top Layer w6: R7.2@360.51,37.86 365.41,42.76 365.41,50.74 369.85,55.18 370.44,55.18 372.76,57.49 372.76,76.74 377.35,81.33 377.35,86.98 v1@376.98,87.36 ; U1.G6 366.46,90.24 374.1,90.24 v1(375.36,88.97) ; C7.1@387.39,209.65 C7.1 ; D3.1 D3.4 ; D3.1@441.93,122.04 454.72,134.84 U2.4
  Top Layer w10: U1.A6 366.14,188.4 C7.1@387.39,209.65 ; C7.1 410.03,209.65 415.91,209.65 v1@427.67,197.88 ; v1@429.88,193.35 437.31,185.93 U2.4
  Bottom Layer w10: v1(375.36,88.97) 377.22,90.83 377.22,104.56 378.49,105.84 378.49,135.49 430.86,187.85 v1(430.86,193.35)
VIN_BAT: C9.2 C12.1 L3.1 S1.2 U2.6 U3.5 | length 1314
  Top Layer w6: U2.6 U2.6@529.53,189.2 ; v1(905.51,306.4) v1@905.62,306.29 ; C12.1@1042.76,294.53 C12.1 1053.94,273.51 1083.42,244.02 1083.42,236.22
  Top Layer w10: C9.2@498.52,152.19 U2.6@530.89,184.56 ; U2.6@530.96,184.5 554.24,207.78 v1(554.24,216.86) ; v1@905.62,306.29 984.3,306.29 L3.1 C12.1@1042.76,294.53
  Bottom Layer w6: S1.2 894.5,196.83 905.28,207.61 905.28,227.79 916.28,238.79 916.28,291.93 905.51,302.7 v1(905.51,306.4)
  Bottom Layer w10: 242.17,262.16 390.11,262.16 462.02,190.25 536.43,190.25 534.03,187.85 ; 539.09,192.91 554.24,208.06 v1(554.24,216.86) ; 651.02,203.24 754.18,306.4 v1(905.51,306.4) 1069.76,306.4 1103.46,272.7
VIN_EN: R1.1 S1.1 U2.1 U3.4 U4.15 | length 1075.8
  Top Layer w6: U2.1 529.53,296.43 534.03,291.93 539.37,291.93 554.24,277.06 v1(554.24,267.15) ; U4.15 691.73,240.72 691.73,259.19 706.82,274.28 706.82,286.92 696.37,297.37 668.26,297.37 v1(666.17,295.28) 663.09,298.35 630.36,298.35 594.49,262.48 594.49,121.16 653.16,62.48 653.16,60.86 670.24,43.79 727.88,43.79 741.9,57.81 v1(837.2,57.81) ; v1(1078.74,167.55) 1081.36,170.17 1094.88,170.17 1124.02,199.3 U3.4
  Bottom Layer w6: 539.37,295.28 554.24,280.41 v1(554.24,267.15) ; 640.56,299.19 662.25,299.19 v1(666.17,295.28) ; v1(837.2,57.81) 842.09,57.81 863,78.72 S1.1 989.9,78.72 v1(1078.74,167.55)
XC1: C1.2 U1.A1 X1.1 | length 106
  Top Layer w6: C1.2@200.49,214.16 200.69,213.96 X1.1 ; X1.1@230.72,215.85 cw(c226.47,211.61) 230.93,215.63 230.93,212.66 274.3,169.29 U1.A1
XC2: C2.2 U1.A2 X1.3 | length 116.6
  Top Layer w6: C2.2@261.02,267.1 260.93,267 X1.3 261.91,240.34 269.52,232.73 ccw(c273.77,236.97) 272.65,231.08 cw(c271.16,223.22) 279.16,223.22 279.16,206.52 ccw(c285.16,206.52) 280.92,202.27 301.37,181.82 cw(c297.15,177.56) 303.15,177.56 U1.A2
pads on no net: S1.3 S1.4 S1.5 U1.A5 U1.B5 U1.D5 U1.E2 U1.E5 U1.F2 U1.F3 U1.F4 U1.F5 U2.3 U2.5 U3.6 U4.3 U4.4 U4.5 U4.9 X1.2
copper on no net:
  other v2: 470.47,242.03 513.78,242.03

## Polygon pours and split planes (outlines as drawn)
GND on Bottom Layer "Bottom Layer-GND" (solid, pour order 17): 0,0 1165.35,0 1165.35,326.77 0,326.77
GND on Top Layer "Top Layer-GND" (solid, pour order 16): 0,0 1165.35,0 1165.35,326.77 0,326.77

## Keep-outs
Keep-Out Layer:
  lines w6: 582.68,0 1165.35,0 1165.35,326.77 582.68,326.77 ; 582.68,0 582.68,326.77 ; 582.68,0 0,0 0,326.77 582.68,326.77
  lines w10: 14.57,-570.87 487.01,-570.87 487.01,-98.42 14.57,-98.43 14.57,-570.87

## Other copper
Top Layer:
  region net SWDIO: 175.83,49.82 175.83,99.82 135.83,99.82 135.83,49.82
  region net SWDCLK: 120.71,50.15 120.71,100.15 80.71,100.15 80.71,50.15
  pour cut-out: 289.65,169.17 289.65,124.17 304.65,124.17 304.65,169.17
Bottom Layer:
  rectangle net PAD_B: 965.75,24.09 1015.75,64.09
  rectangle net VIN_BAT: 1076.38,232.72 1151.38,291.77
  rectangle net VIN_BAT: 217.54,232.17 292.54,291.22
  rectangle net GND: 217.54,35.56 292.54,94.61
  rectangle net PAD_A: 60.24,56.46 110.24,96.46
  rectangle net P0.12: 681.1,93.17 731.1,133.17
  rectangle net P0.12: 438.19,96.31 488.19,136.31
  rectangle net VIN_EN: 511.81,274.96 561.81,314.96
  rectangle net VIN_BAT: 511.81,170.32 561.81,210.32
  rectangle net P0.15: 511.81,118 561.81,158
  rectangle net P0.16: 511.81,65.67 561.81,105.67
  rectangle net GND: 511.81,13.35 561.81,53.35
  rectangle net PAD_A: 438.19,45.08 488.19,85.08
  rectangle net GND: 1076.38,36.1 1151.38,95.16
  rectangle net PAD_A: 603.82,222.64 653.82,262.64
  rectangle net GND: 603.82,13.35 653.82,53.35
  rectangle net P0.16: 603.82,65.67 653.82,105.67
  rectangle net P0.15: 603.82,118 653.82,158
  rectangle net VIN_BAT: 603.82,170.32 653.82,210.32
  rectangle net VIN_EN: 603.82,274.96 653.82,314.96

## Silkscreen, mask and mechanical layers (free items; w line width, h text height)
Top Overlay:
  text "v1.0" at 105.55,150.31 h20
  text "SWDIO" at 183.13,45.82 h19
  text "SWDCLK" at 84.71,17.04 h19
Bottom Overlay:
  lines w4: 421.91,145.09 424.77,142.24 489.25,142.24 501.3,130.18 501.3,114.88 506.94,109.24 ; 457.92,175.35 462.19,179.62 492.92,179.52 509.29,163.15 ; 653.32,158.5 664.69,169.87 681.31,169.87 694.75,156.43 699.49,156.43 ; 658.86,93.26 670.77,105.16 670.77,132.16 ; 737.96,110.34 744.09,104.2 744.09,87.86
  text "V_EN" at 733.9,286.24 h19
  text "V_EN" at 490.73,285.29 h19
  text "PAD_A" at 747.06,233.54 h19
  text "BAT+" at 1147.58,197.9 h19
  text "BAT+" at 288.74,197.35 h19
  text "V_BAT" at 491.97,189.04 h19
  text "V_BAT" at 747.88,181.48 h19
  text "IN1/2" at 490.58,151.24 h19
  text "IN1/2" at 747.06,140.98 h19
  text "BAT-" at 1146.15,115.77 h19
  text "BAT-" at 287.31,115.22 h19
  text "PAD_A" at 129.86,109.53 h19
  text "FAULT" at 421.2,107.31 h19
  text "PAD_B" at 1035.37,77.16 h19
  text "FAULT" at 747.88,59.54 h19
  text "PAD_A" at 422.88,57.3 h19
  text "GND" at 725.14,20.13 h19
  text "GND" at 490.73,14.64 h19
Mechanical 1:
  lines w6: 582.68,0 1165.35,0 1165.35,326.77 582.68,326.77 ; 582.68,0 582.68,326.77 ; 582.68,0 0,0 0,326.77 582.68,326.77

## Dimensions
0,326.77 to 1165.35,326.77 on Top Overlay
0,326.77 to 0,0 on Top Overlay
661.42,326.77 to 661.42,-78.74 on Mechanical 3
0,-78.74 to 661.42,-78.74 on Mechanical 3